# Altium PCB PCB.PcbDoc (part 3 of 3)
Units mm, origin at the board's own origin, x right, y up, seen from the top; angles counter-clockwise.
Board outline 103.89 x 68.2 mm, 6 copper layers (Top Layer, GND1, Internal 1, VCC, Internal 2, Bottom Layer), stack 0.851 mm thick; 117 components, 96 nets, 737 pads, 258 vias.
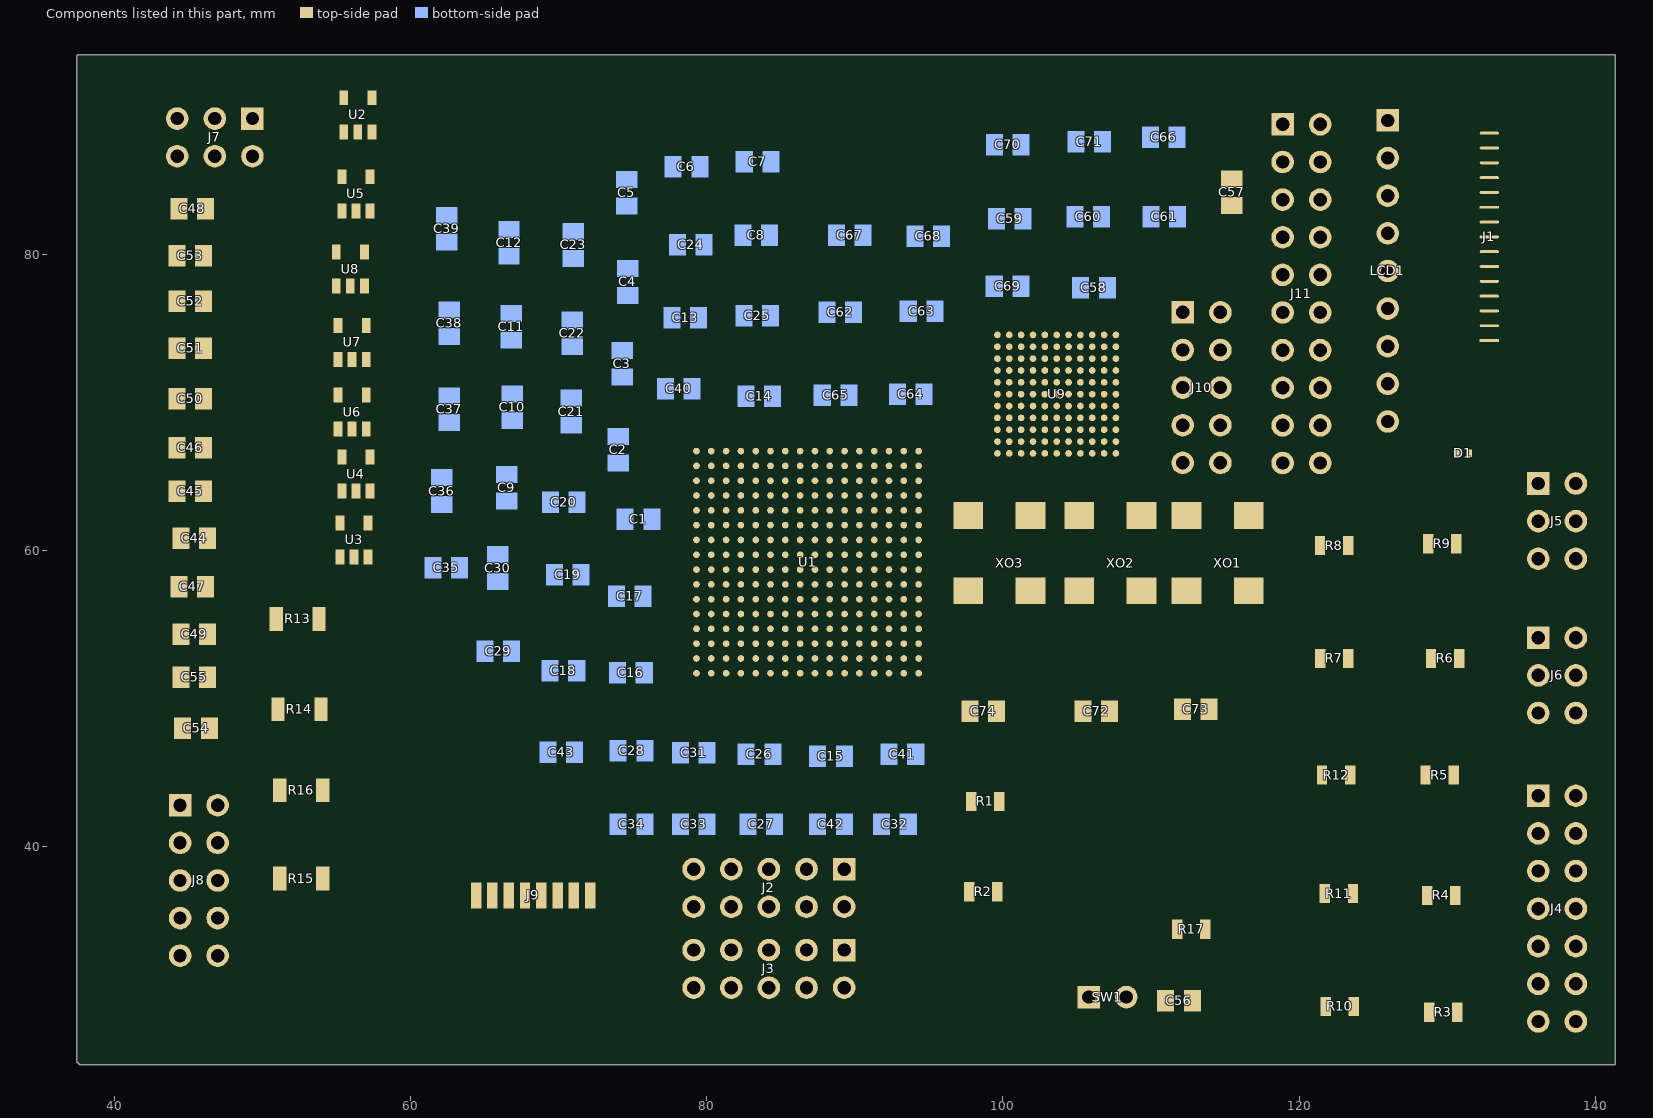
[diagram p7: the components of this part, seen from the top]

## Other copper
Multi-Layer:
  lines w0.254: 37.338,25.4 141.224,25.4 141.224,93.345 37.338,93.345 37.338,25.4

## Silkscreen, mask and mechanical layers (free items; w line width, h text height)
Top Overlay:
  text "Magne Haneberg / Ludvig Samuelsen Jordet / Olav Markussen / Eirik Rognø / Katrine Roland / Arne Sund / Edgar Vedvik / Ilse Visser" at 60.579,68.312 h3.52
Bottom Overlay:
  drawing of 5082 lines, arcs and shapes, not listed